# Altium PCB pir.PcbDoc
Units mil, origin at the board's own origin, x right, y up, seen from the top; angles counter-clockwise.
Board outline 1401.57 x 1050 mil, 4 copper layers (Top Layer, L2, L3, Bottom Layer), stack 74.104 mil thick; 60 components, 32 nets, 149 pads, 26 vias.
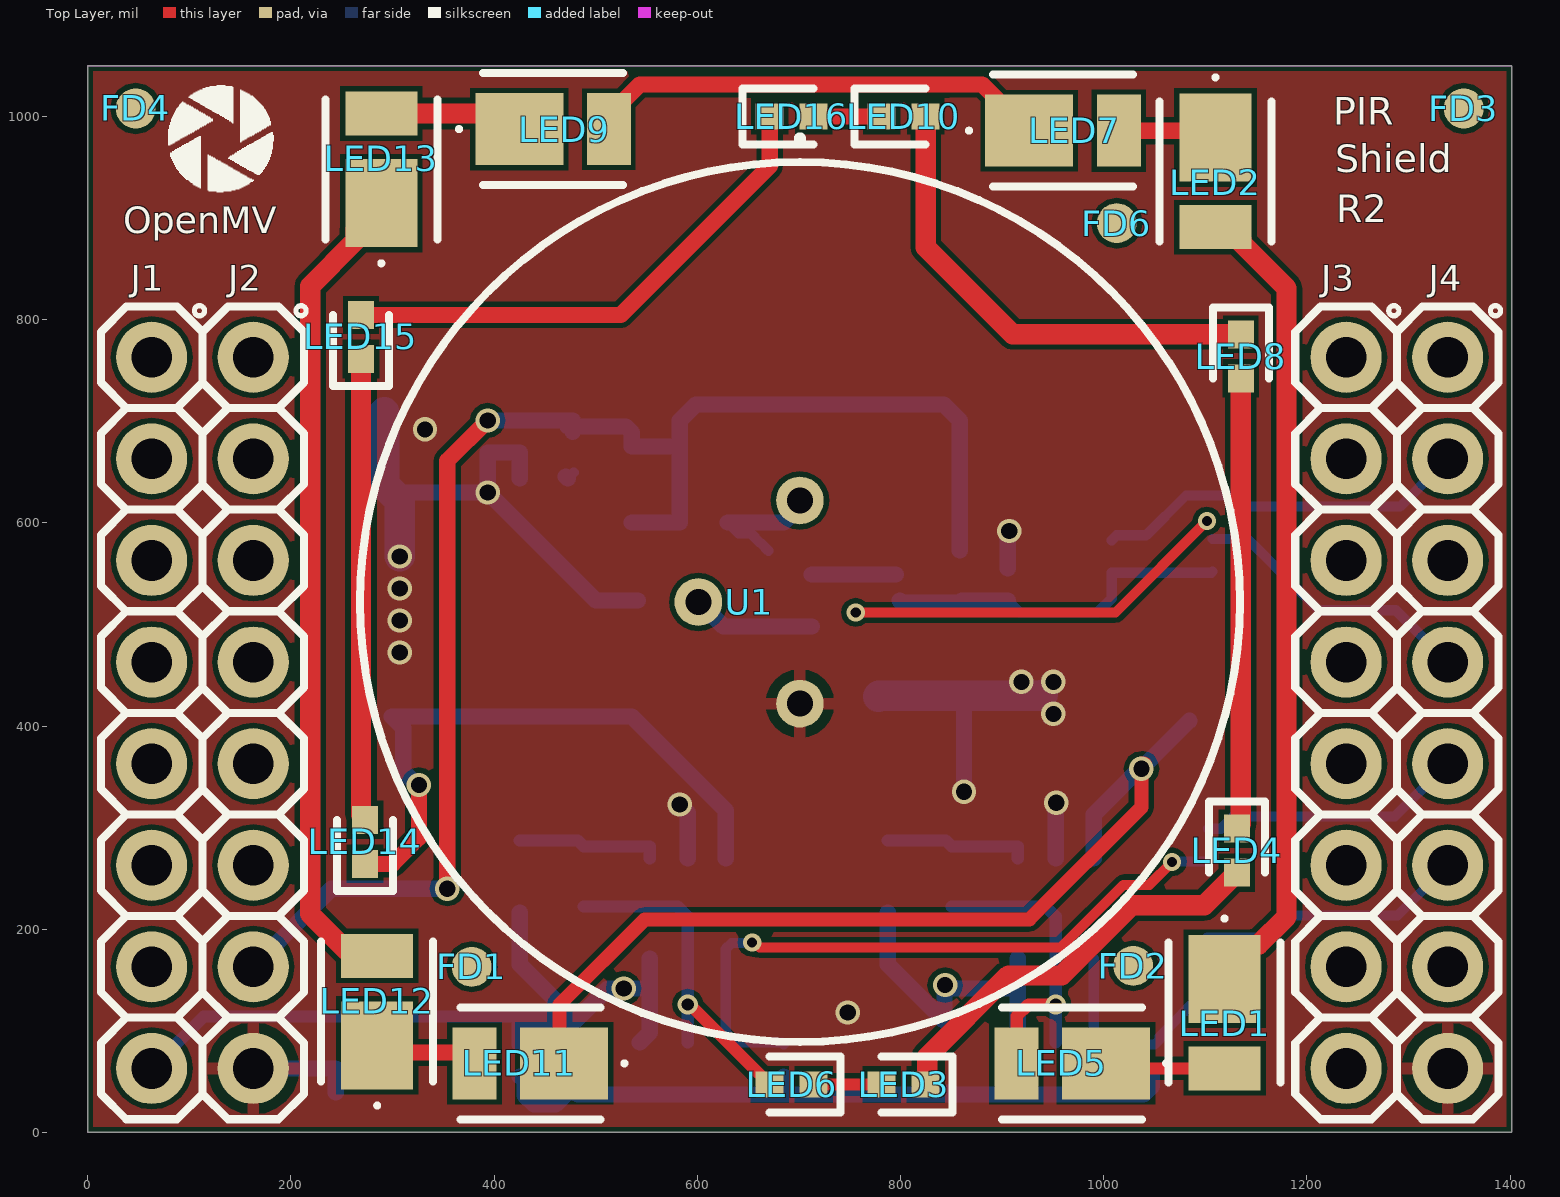
[diagram p0: Top Layer view]
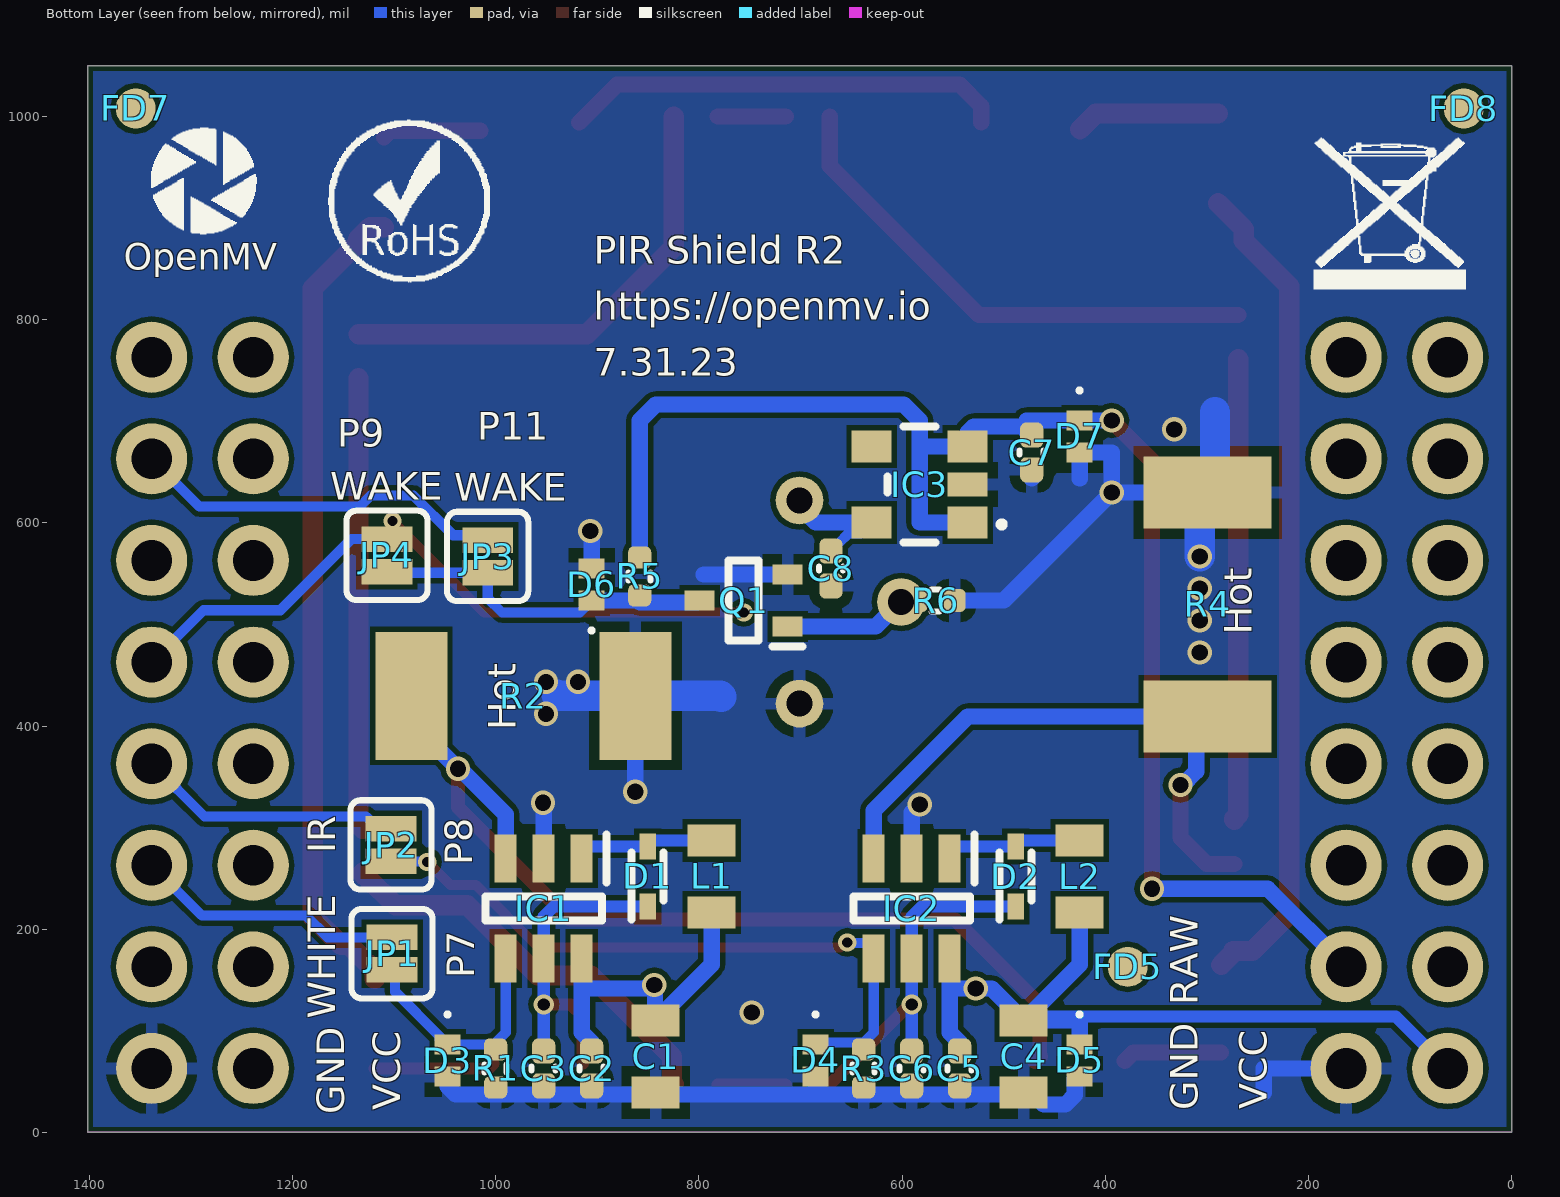
[diagram p1: Bottom Layer view, seen from below]
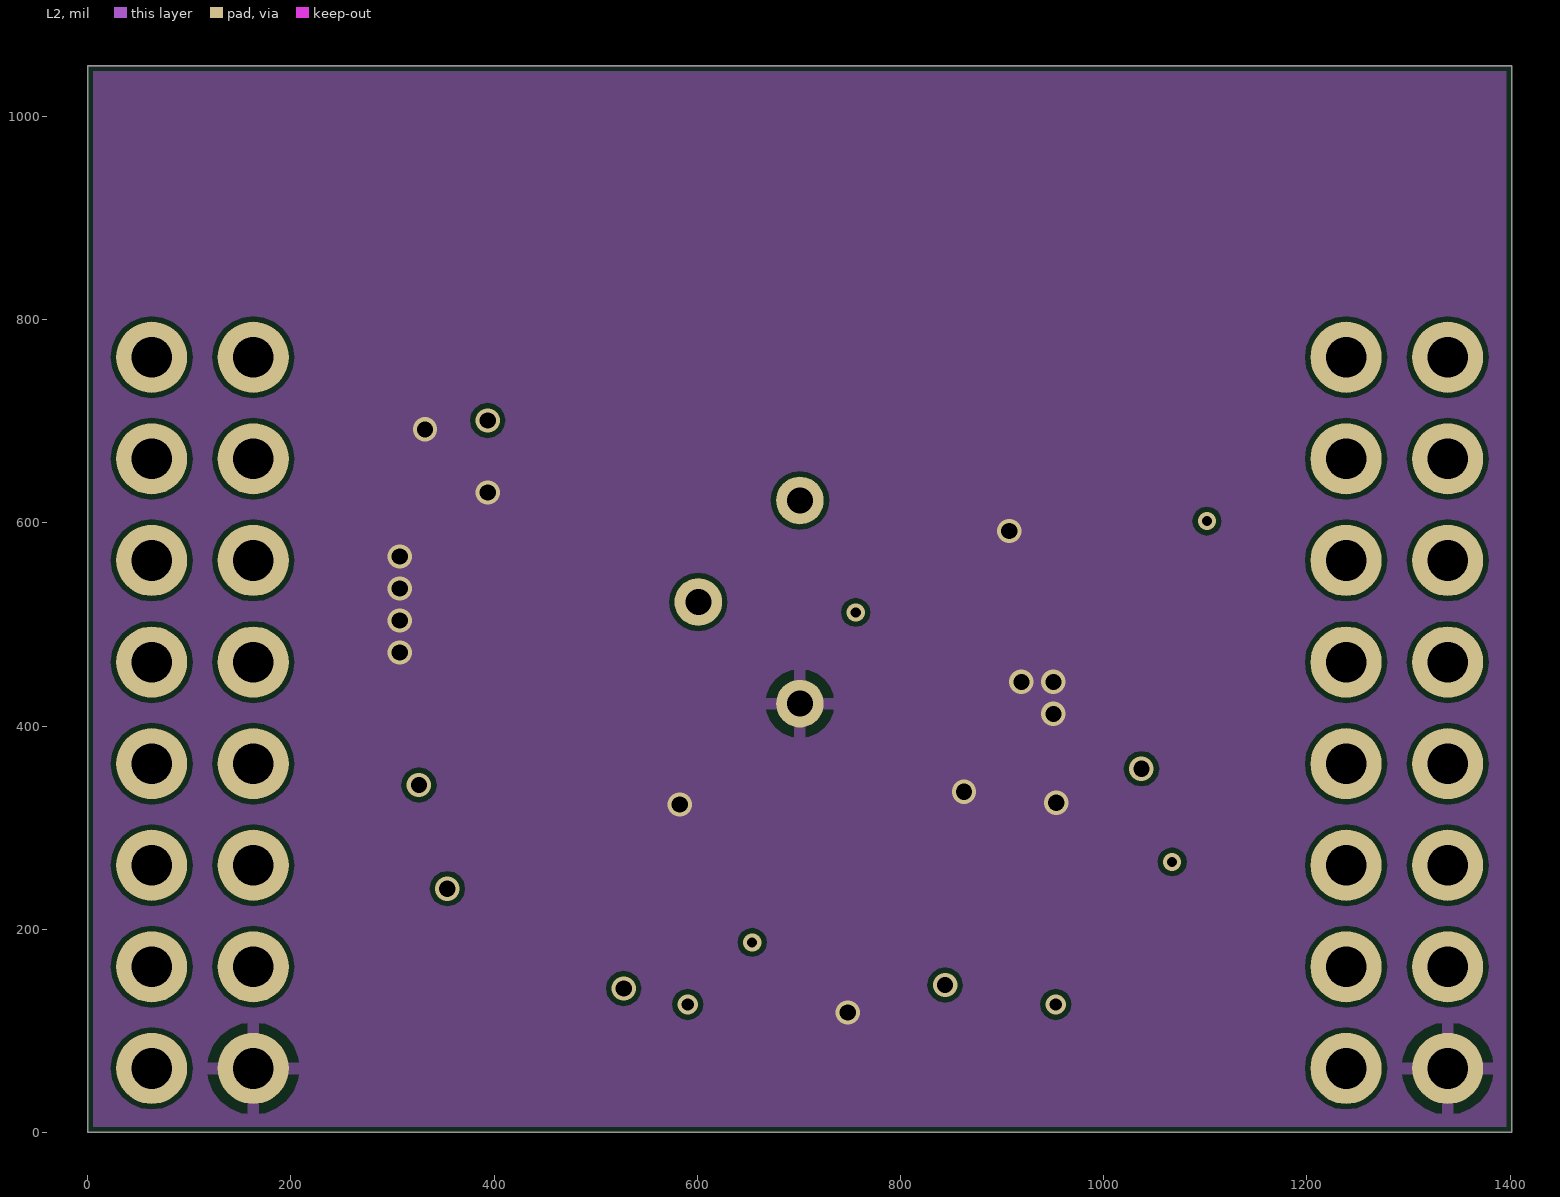
[diagram p2: L2]
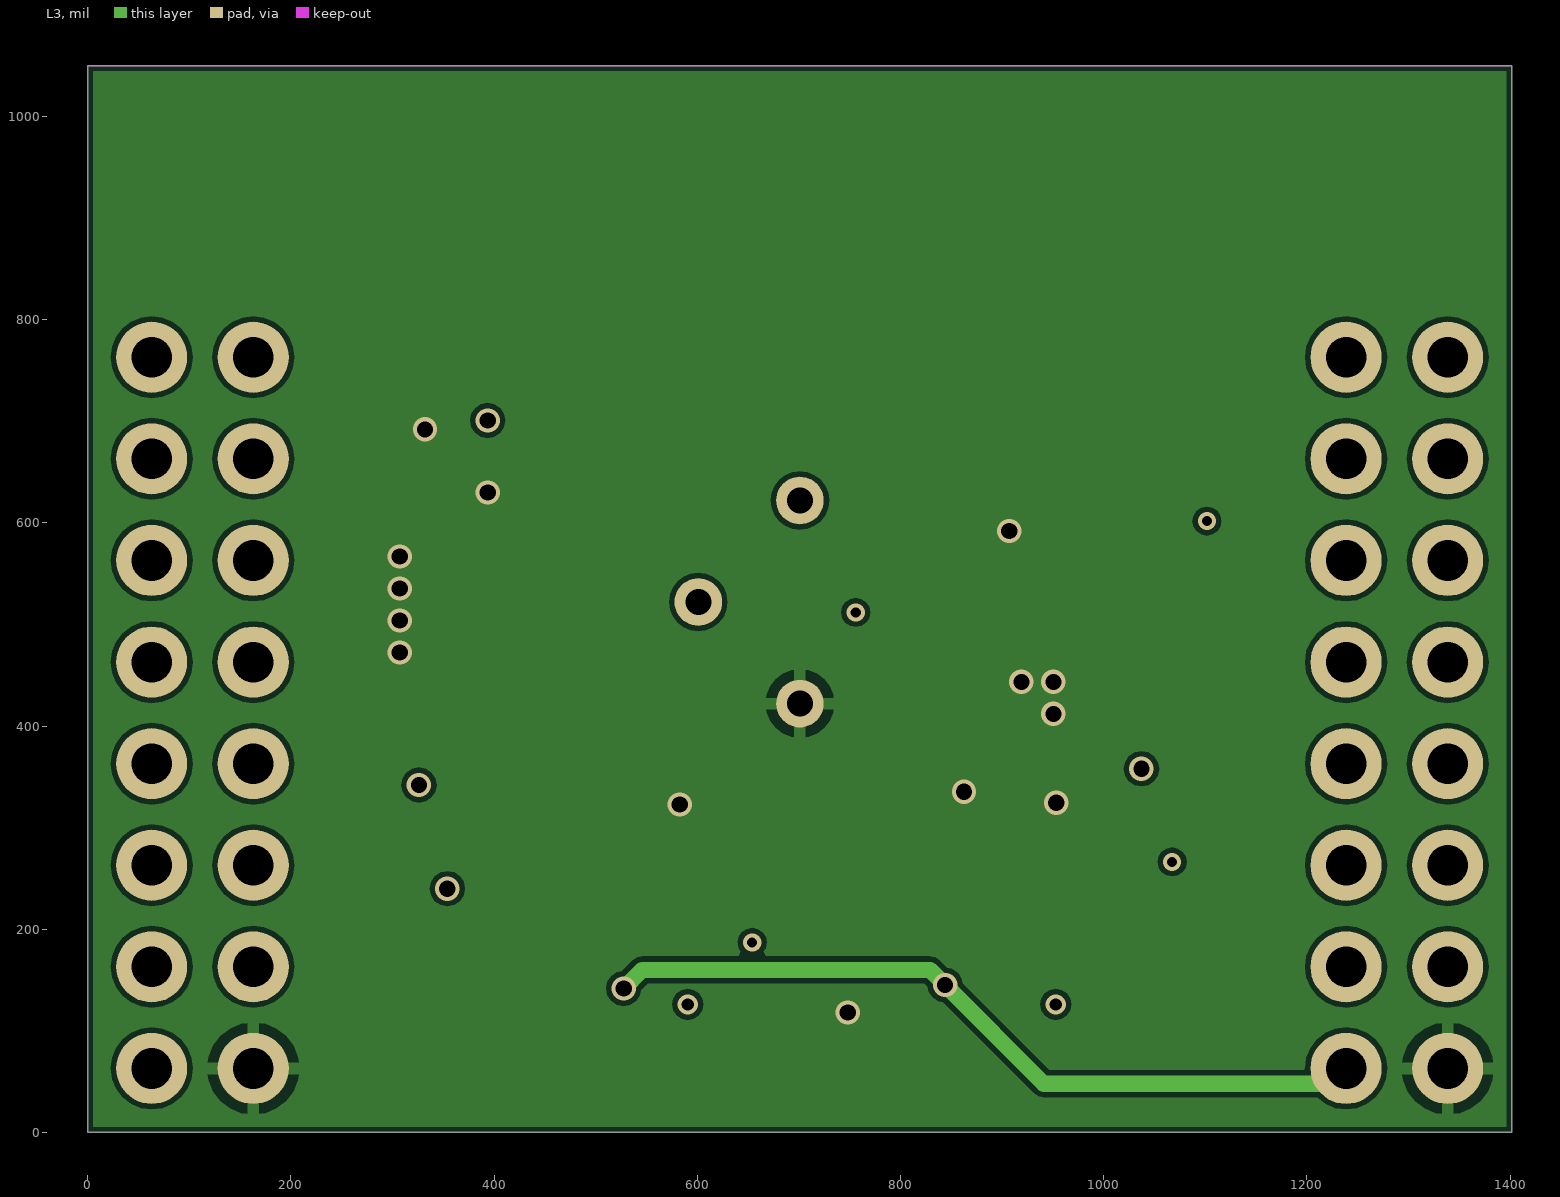
[diagram p3: L3]
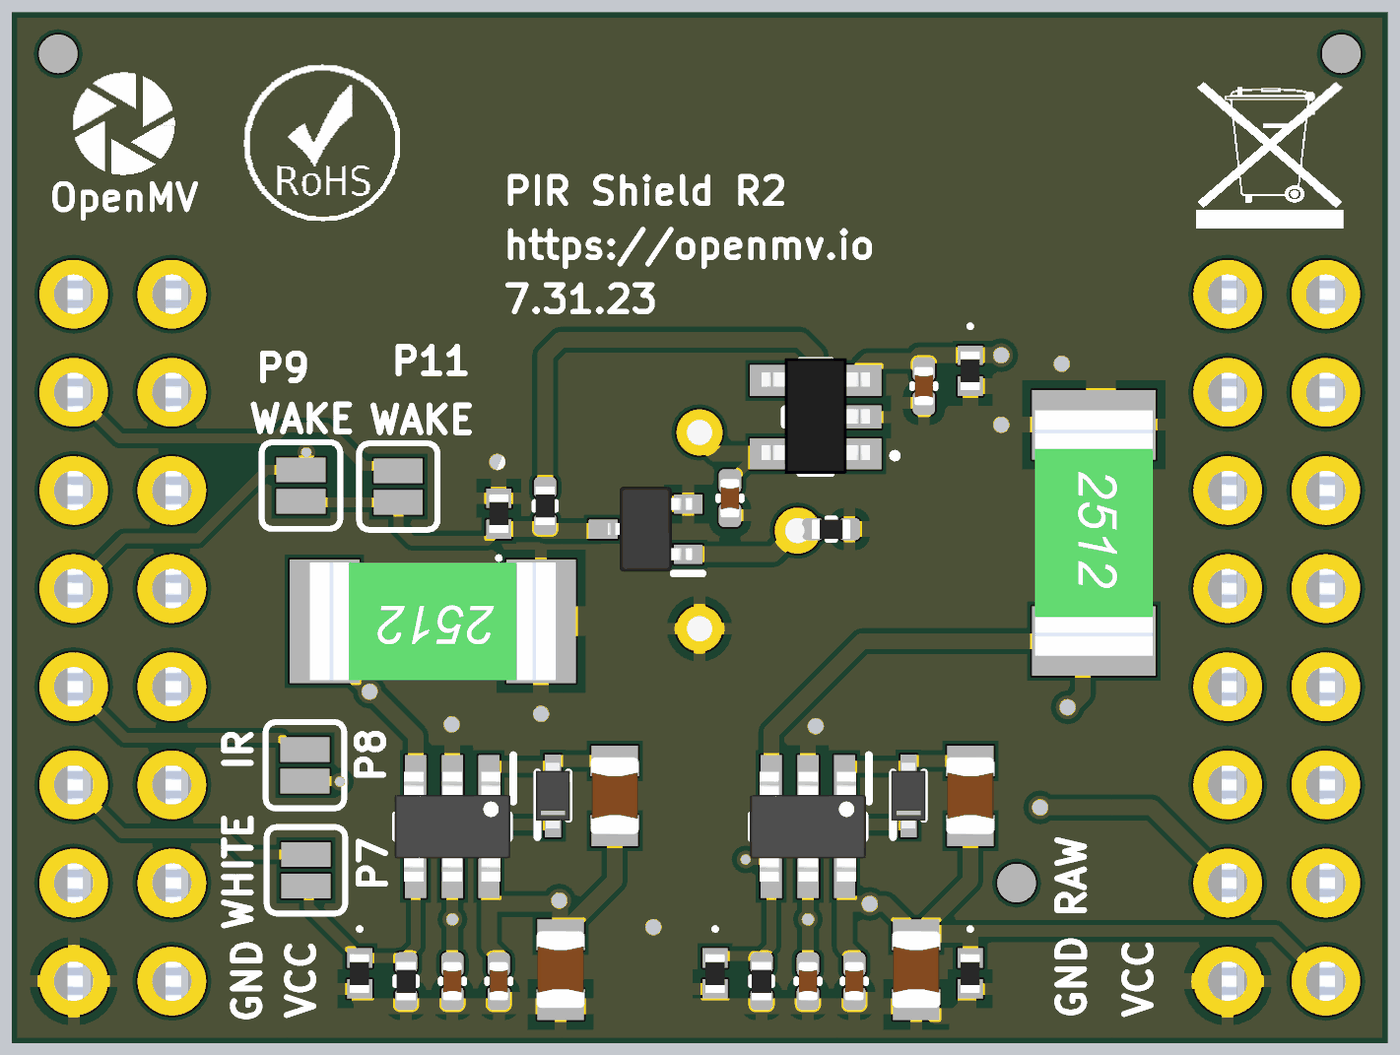
[diagram p4: 3D render of the assembled board from below, using the file's embedded part models]

## Layer stack, top to bottom
Top Solder: solder mask 0.4, Solder Resist, Dk 3.5
Top Layer: signal copper 1.378
Dielectric 2: prepreg 2.8, PP-006, Dk 4.1
L2: signal copper 1.378
Dielectric 1: dielectric 62.9921, FR-4, Dk 4.8
L3: signal copper 1.378
Dielectric 3: prepreg 2.8, PP-006, Dk 4.1
Bottom Layer: signal copper 1.378
Bottom Solder: solder mask 0.4, Solder Resist, Dk 3.5

## Board outline
0,1050 0,0 1401.57,0 1401.57,1050

## Design rules (kind name [scope] priority, off if disabled: settings)
BoardOutlineClearance mdCopperDimension [All] p1: gap=5 ignorepadtopadclearanceinfootprint=FALSE
Clearance [All] p1: gap=5 ignorepadtopadclearanceinfootprint=FALSE
ComponentClearance [InComponent('J1') or InComponent('J2') or InComponent('J?') or InComponent('U1')] p1: gap=0 collisioncheckmode=3 verticalgap=0 showdistances=FALSE
ComponentClearance ComponentClearance_1 [All] p2: gap=10 collisioncheckmode=3 verticalgap=10 showdistances=FALSE
HoleSize HoleSize_For_NetClass_signal [InNetClass('signal')] p1: absolutevalues=TRUE maxlimit=10 minlimit=10 maxpercent=80.000 minpercent=20.000
HoleSize HoleSize_For_NetClass_pwr [InNetClass('pwr')] p2: absolutevalues=TRUE maxlimit=10 minlimit=10 maxpercent=80.000 minpercent=20.000
HoleSize HoleSize_For_NetClass_gnd [InNetClass('gnd')] p3: absolutevalues=TRUE maxlimit=10 minlimit=10 maxpercent=80.000 minpercent=20.000
HoleSize HoleSize_For_NetClass_led [InNetClass('led')] p4: absolutevalues=TRUE maxlimit=10 minlimit=10 maxpercent=80.000 minpercent=20.000
HoleSize [All] p5: absolutevalues=TRUE maxlimit=100000 minlimit=10 maxpercent=80.000 minpercent=20.000
HoleToHoleClearance mdDrill [All] p1: gap=10 allowstackedmicrovias=TRUE
MinimumSolderMaskSliver [All] p1 off: minsoldermaskwidth=10
PasteMaskExpansion Expansion_SMDPaste_OFF [InPadClass('SMDPaste_OFF')] p1: expansion=0
PasteMaskExpansion mlMinCreamFrame [All] p2: expansion=0
PolygonConnect PolygonConnect_For_PolygonThermal_ON_Width120000_Gap100000 [InPolygonClass('PolygonThermal_ON_Width120000_Gap100000') vs Not IsVia] p1: connectstyle=Relief reliefconductorwidth=12 reliefentries=4 polygonreliefangle="90 Angle" airgapwidth=10
PolygonConnect ThermalVias [IsVia] p2: connectstyle=Direct reliefconductorwidth=10 reliefentries=4 polygonreliefangle="90 Angle" airgapwidth=10
PolygonConnect [All] p3: connectstyle=Relief reliefconductorwidth=10 reliefentries=4 polygonreliefangle="90 Angle" airgapwidth=10
RoutingVias [All] p1: holewidth=10 width=18 viastyle="Through Hole" minholewidth=10 minwidth=18 maxholewidth=100 maxwidth=100
SolderMaskExpansion mlMinStopFrame [All] p1: expansion=2 istentingtop=FALSE
Width [All] p1: maxlimit=200 minlimit=5 preferedwidth=5
25 further rules are at their usual default settings.

## Classes and differential pairs
polygon class PolygonThermal_ON_Width120000_Gap100000: Polygon_1_Net_GND Polygon_2_Net_GND
polygon class Isolate_6: Polygon_1_Net_GND Polygon_2_Net_GND
pad class SMDPaste_OFF: FD1-1 FD2-1 FD3-1 FD4-1 FD5-1 FD7-1 FD8-1 JP1-1 JP1-2 JP2-1 JP2-2 JP3-1 JP3-2 JP4-1 JP4-2

## Components (designator, comment, footprint, x,y, rotation, side; value= is the part's Value field where it differs from the comment)
C1 "22uF" 0805 842.52,74.8 r90 bottom
C2 "4.7uF" 0402-CAP 905.51,62.99 r90 bottom
C3 "1uF" 0402-CAP 952.76,62.99 r90 bottom
C4 "22uF" 0805 480.32,74.8 r90 bottom
C5 "4.7uF" 0402-CAP 543.31,62.99 r90 bottom
C6 "1uF" 0402-CAP 590.55,62.99 r90 bottom
C7 "4.7uF" 0402-CAP 472.44,669.29 r90 bottom
C8 "4.7uF" 0402-CAP 670,555.13 r90 bottom
D1 "RB520S30T5G" SODFL1608X70N 850.39,251.97 r90 bottom
D2 "RB520S30T5G" SODFL1608X70N 488.19,251.97 r90 bottom
D3 "CPDQT5V0HE-HF" CPDQT5V0HEHF 1047.24,70.87 r270 bottom
D4 "CPDQT5V0HE-HF" CPDQT5V0HEHF 685.04,70.87 r270 bottom
D5 "CPDQT5V0HE-HF" CPDQT5V0HEHF 425.2,70.87 r270 bottom
D6 "CPDQT5V0HE-HF" CPDQT5V0HEHF 905.51,539.37 r90 bottom
D7 "CPDQT5V0HE-HF" CPDQT5V0HEHF 425.2,685.04 r270 bottom
FD1 "FIDUCIAL1X2" FIDUCIAL-1X2 378,163 r0 top
FD2 "FIDUCIAL1X2" FIDUCIAL-1X2 1029,164 r0 top
FD3 "FIDUCIAL1X2" FIDUCIAL-1X2 1354.33,1007.87 r0 top
FD4 "FIDUCIAL1X2" FIDUCIAL-1X2 47.24,1007.87 r0 top
FD5 "FIDUCIAL1X2" FIDUCIAL-1X2 378,163 r180 bottom
FD6 "FIDUCIAL1X2" FIDUCIAL-1X2 1013,895 r0 top
FD7 "FIDUCIAL1X2" FIDUCIAL-1X2 1354.33,1007.87 r180 bottom
FD8 "FIDUCIAL1X2" FIDUCIAL-1X2 47.24,1007.87 r180 bottom
IC1 "AP3032KTR-G1" SOT95P280X145-6N 952.76,220.47 r270 bottom
IC2 "AP3032KTR-G1" SOT95P280X145-6N 590.55,220.47 r270 bottom
IC3 "TCR2LF33,LM_CT" TCR2LF33LMCT 582.68,637.8 r90 bottom
J1 "SSQ-108-03-T-S" HDR_1X8 62.99,762.99 r0 top
J2 "SSQ-108-03-T-S" HDR_1X8 162.99,762.99 r0 top
J3 "SSQ-108-03-T-S" HDR_1X8 1238.58,762.99 r0 top
J4 "SSQ-108-03-T-S" HDR_1X8 1338.58,762.99 r0 top
JP1 "JUMPER-SMT_2_NC_PASTE_SILK" SMT-JUMPER_2_NC_PASTE_SILK 1102,176 r270 bottom
JP2 "JUMPER-SMT_2_NC_PASTE_SILK" SMT-JUMPER_2_NC_PASTE_SILK 1103,283 r270 bottom
JP3 "JUMPER-SMT_2_NC_PASTE_SILK" SMT-JUMPER_2_NC_PASTE_SILK 1007.87,566.93 r270 bottom
JP4 "JUMPER-SMT_2_NO_SILK" SMT-JUMPER_2_NO_SILK 1107,568 r270 bottom
L1 "6.8uH" 0805 787.4,251.97 r90 bottom
L2 "6.8uH" 0805 425.2,251.97 r90 bottom
LED1 "JB2835AWT-W-U57EA0000-N0000001" JB2835AWTWU57EA0000N0000001 1119,118 r90 top
LED2 "JB2835AWT-W-U57EA0000-N0000001" JB2835AWTWU57EA0000N0000001 1110,946 r90 top
LED3 "SFH_4053" LEDC1005X55N 803.15,47.24 r180 top
LED4 "SFH_4053" LEDC1005X55N 1131,277.35 r270 top
LED5 "JB2835AWT-W-U57EA0000-N0000001" JB2835AWTWU57EA0000N0000001 969,68 r0 top
LED6 "SFH_4053" LEDC1005X55N 692.91,47.24 r180 top
LED7 "JB2835AWT-W-U57EA0000-N0000001" JB2835AWTWU57EA0000N0000001 960,986 r180 top
LED8 "SFH_4053" LEDC1005X55N 1135,764 r270 top
LED9 "JB2835AWT-W-U57EA0000-N0000001" JB2835AWTWU57EA0000N0000001 458.07,987.55 r180 top
LED10 "SFH_4053" LEDC1005X55N 803.15,1000 r0 top
LED11 "JB2835AWT-W-U57EA0000-N0000001" JB2835AWTWU57EA0000N0000001 435.71,68 r0 top
LED12 "JB2835AWT-W-U57EA0000-N0000001" JB2835AWTWU57EA0000N0000001 285,119 r270 top
LED13 "JB2835AWT-W-U57EA0000-N0000001" JB2835AWTWU57EA0000N0000001 289,948 r270 top
LED14 "SFH_4053" LEDC1005X55N 273,286 r90 top
LED15 "SFH_4053" LEDC1005X55N 269,783 r90 top
LED16 "SFH_4053" LEDC1005X55N 692.91,1000 r0 top
Q1 "2N7002KW_R1_00001" SOT65P210X110-3N 755.91,523.62 r0 bottom
R1 "100K" 0402-RES 1000,62.99 r270 bottom
R2 "3.9" R2512 972.75,429.79 r0 bottom
R3 "100K" 0402-RES 637.8,62.99 r270 bottom
R4 "3.9" R2512 299.21,519.68 r270 bottom
R5 "100K" 0402-RES 858.27,547.24 r90 bottom
R6 "100K" 0402-RES 566.93,523.62 r180 bottom
U1 "EKMB1307113K" EKMB1304111K 701,622.11 r180 top locked

## Footprints (in the part's own frame and the unit in brackets; to place one, negate y for a bottom-side part, rotate by r counter-clockwise, add the part's x,y. Pads: shape width x height; smd on the part's side, far side on the other; paste and mask are expansions set on the pad)
0402-CAP [mm] "Chip Capacitor, 2-Leads, Body  0402 (in) 1005 (mm), IPC Medium Density"
  rrect52% 0.63x0.58 smd mask+0.05: 1(-0.435,0) 2(0.435,0)
  silkscreen extent -0.05,-0.3 0.05,0.3, body extent -0.5,-0.25 0.5,0.25, height 0.5
0402-RES [mm] "Chip Resistor, 2-Leads, Body  0402 (in) 1005 (mm), IPC Medium Density"
  rrect51% 0.55x0.58 smd mask+0.05: 1(-0.475,0) 2(0.475,0)
  silkscreen extent -0.1,-0.28 0.1,0.28, body extent -0.5,-0.25 0.5,0.25, height 0.34
0805 [mil] "0805"
  rect 31.5x47.24 smd: 1(-35.43,0) 2(35.43,0)
  body extent -39,-25 39,25, height 49
CPDQT5V0HEHF [mm] "CPDQT5V0HEHF"
  rect 0.5x0.65 smd: 1(-0.4,0) 2(0.4,0)
  silkscreen extent -1.2,-0.05 -1.1,0.05, body extent -0.5,-0.25 0.5,0.25, height 0.34
EKMB1304111K [mm] "EKMB1304111K"
  round 1.192 hole 0.65: 1(0,0) 2(2.54,2.54) 3(0,5.08)
  silkscreen extent -11,-9.1 11,13.54, body extent -5.5,-2.96 5.5,8.04, height 10.9
FIDUCIAL-1X2 [mm] "FIDUCIAL-1X2"
  rrect100% 1x1 smd paste+0: 1(0,0)
HDR_1X8 [mil]
  round 70 hole 40: 1(0,0) 2(0,-100) 3(0,-200) 4(0,-300) 5(0,-400) 6(0,-500) 7(0,-600) 8(0,-700)
  silkscreen extent -50,-750 52,51, body extent -50,-750 50,50, height 335
JB2835AWTWU57EA0000N0000001 [mil] "JB2835AWTWU57EA0000N0000001"
  rect 86.61x70.87 smd: 1(33.27,0)
  rect 43.31x70.87 smd: 2(-54.92,0)
  silkscreen extent -69,-55 94,55, body extent -69,-55 69,55, height 28
LEDC1005X55N [mm] "LEDC1005X55N"
  rect 0.7x0.65 smd: 1(-0.55,0) 2(0.55,0)
  silkscreen extent -1.23,-0.7 0.55,0.7, body extent -0.51,-0.25 0.51,0.25, height 0.51
R2512 [mil] "R2512"
  rect 70.87x125.98 smd: 1(-110.24,0) 2(110.24,0)
  body extent -125,-60 125,60, height 60
SMT-JUMPER_2_NC_PASTE_SILK [mil] "SMT-JUMPER_2_NC_PASTE_SILK"
  rect 25x50 smd paste+0: 1(-16,0) 2(16,0)
  silkscreen extent -44,-40 44,40
SMT-JUMPER_2_NO_SILK [mil] "SMT-JUMPER_2_NO_SILK"
  rect 25x50 smd paste+0: 1(-16,0) 2(16,0)
  silkscreen extent -44,-40 44,40
SODFL1608X70N [mil] "SODFL1608X70N"
  rect 25.2x16.54 smd: 1(-29.53,0) 2(29.53,0)
  silkscreen extent -42,-16 24,16, body extent -34,-17 34,17, height 18
SOT65P210X110-3N [mm] "SOT65P210X110-3N"
  rect 0.75x0.5 smd: 1(-1.1,0.65) 2(-1.1,-0.65) 3(1.1,0)
  silkscreen extent -1.47,-1 0.37,1.15, body extent -1.2,-1.1 1.2,1.1, height 1.1
SOT95P280X145-6N [mil] "SOT95P280X145-6N"
  rect 47.24x21.65 smd: 1(-49.21,37.4) 2(-49.21,0) 3(-49.21,-37.4) 4(49.21,-37.4) 5(49.21,0) 6(49.21,37.4)
  silkscreen extent -73,-57 12,62, body extent -56,-59 56,59, height 44
TCR2LF33LMCT [mm] "TCR2LF33LMCT"
  rect 0.8x1 smd: 1(-0.95,-1.2) 3(0.95,-1.2) 4(0.95,1.2) 5(-0.95,1.2)
  rect 0.6x1 smd: 2(0,-1.2)
  silkscreen extent -1.45,-2.1 1.45,0.8, body extent -1.46,-1.4 1.52,1.4, height 1.18

## Part data
C1 C4: library part 22UF-0805-6.3V-20%, "22ÂµF ceramic capacitors    A capacitor is a passive two-terminal electrical component used to store electrical energy temporarily in an electric field.", MPN=CL21A226MQQNNNE, DeviceName=-0805-6.3V-20%, DeviceSetName=22UF, GateName_1=G$1, LibraryName=SparkFun-Capacitors, PROD_ID=CAP-08402, SymbolName_1=CAP
C2 C5 C7 C8: library part CAP0402-CAP, "CapacitorStandard 0603 ceramic capacitor, and 0.1\" leaded capacitor.", MPN=JMK105BBJ475MV-F, DeviceName=0402-CAP, DeviceSetName=CAP, GateName_1=G$1, LibraryName=sfe, SymbolName_1=CAP
C3 C6: library part CAP0402-CAP, "CapacitorStandard 0603 ceramic capacitor, and 0.1\" leaded capacitor.", MPN=GRM155R6YA105KE11D, DeviceName=0402-CAP, DeviceSetName=CAP, GateName_1=G$1, LibraryName=sfe, SymbolName_1=CAP
D1 D2: "Diode Schottky 30V 0.2A Automotive 2-Pin SOD-523 T/R   Source:  Datasheet", MANUFACTURER_NAME=onsemi, DeviceSetName=RB520S30T5G, GateName_1=G$1, HEIGHT=0.7mm, LibraryName=RB520S30T5G, MANUFACTURER_PART_NUMBER=RB520S30T5G, MOUSER_PART_NUMBER=863-RB520S30T5G, MOUSER_PRICE-STOCK=https://www.mouser.co.uk/ProductDetail/onsemi/RB520S30T5G?qs=M3GgpExcU29g6z8VWjIiaA%3D%3D, MPN=RB520S30T5G, SymbolName_1=RB520S30T5G
D3 D4 D5 D6 D7: "ESD Suppressors / TVS Diodes DIODE ESD 5VWM 65W 0402/SOD-923F   Source:  Datasheet", MANUFACTURER_NAME="Comchip Technology", DeviceSetName=CPDQT5V0HE-HF, GateName_1=G$1, HEIGHT=0.42mm, LibraryName=CPDQT5V0HE-HF, MANUFACTURER_PART_NUMBER=CPDQT5V0HE-HF, MOUSER_PART_NUMBER=MOUSER_PART_NUMBER, MOUSER_PRICE-STOCK=MOUSER_PRICE-STOCK, MPN=CPDQT5V0HE-HF, SymbolName_1=CPDQT5V0HE-HF
FD1 FD2 FD3 FD4 FD5 FD6 FD7 FD8: "Fiducial Alignment Points    Point-of-reference for pick-and-place machines and other optical instruments.", DeviceName=1X2, DeviceSetName=FIDUCIAL, GateName_1=G$1, LibraryName=SparkFun-Aesthetics, SymbolName_1=FIDUCIAL
IC1 IC2: "DiodesZetex AP3032KTR-G1, Step Up DC-DC Converter, Adjustable, Maximum of 38 V, 6-Pin SOT-23   Source:  Datasheet", MANUFACTURER_NAME="Diodes Inc.", DeviceSetName=AP3032KTR-G1, GateName_1=G$1, HEIGHT=1.45mm, LibraryName=AP3032KTR-G1, MANUFACTURER_PART_NUMBER=AP3032KTR-G1, MOUSER_PART_NUMBER=621-AP3032KTR-G1, MOUSER_PRICE-STOCK=https://www.mouser.co.uk/ProductDetail/Diodes-Incorporated/AP3032KTR-G1?qs=x6A8l6qLYDBKP%252BiASla%2FZw%3D%3D, MPN=AP3032KTR-G1, SymbolName_1=AP3032KTR-G1
IC3: "Linear Voltage Regulator IC Positive Fixed 1 Output 200mA SMV   Source:  Datasheet", MANUFACTURER_NAME=Toshiba, MANUFACTURER_PART_NUMBER=TCR2LF33,LM(CT, DeviceSetName=TCR2LF33,LM_CT, GateName_1=G$1, HEIGHT=1.4mm, LibraryName=TCR2LF33_LM_CT, MOUSER_PART_NUMBER=757-TCR2LF33LMCT, MOUSER_PRICE-STOCK=https://www.mouser.co.uk/ProductDetail/Toshiba/TCR2LF33LMCT?qs=lX6dEUlT%252BgfjY8NAoxAO5A%3D%3D, MPN=TCR2LF33,LM(CT, SymbolName_1=TCR2LF33,LM_CT
J1 J2 J3 J4: library part HDR_1X8, MANUFACTURER P/N=SSQ-108-03-T-S
JP1 JP2 JP3: "Normally closed solder jumper    This jumper has an aperture in the stencil to allow solder paste to bridge the split in the wire so it's normally closed (NC). Wick off the solder to open the connection. Reapply solder to reclose the connection.", DeviceName=_SILK, DeviceSetName=JUMPER-SMT_2_NC_PASTE, GateName_1=G$1, LibraryName=SparkFun-Jumpers, SymbolName_1=SMT-JUMPER_2_NC_PASTE
JP4: "Normally open jumper    This jumper has two pads in close proximity to each other. Apply solder to close the connection.   Round pads are easier to solder for beginners, but are a lot larger.   SparkFun Product that uses the round pads:  SparkFun EL Sequencer", DeviceName=_SILK, DeviceSetName=JUMPER-SMT_2_NO, GateName_1=G$1, LibraryName=SparkFun-Jumpers, SymbolName_1=SMT-JUMPER_2_NO
L1 L2: library part INDUCTOR-0805-3.3UH, "Inductors    Resist changes in electrical current. Basically a coil of wire.   SparkFun Products:  SparkFun Load Cell Amplifier - HX711  IOIO-OTG - V2.2", MPN=MLZ2012M6R8WT000, DeviceName=-0805-3.3UH, DeviceSetName=INDUCTOR, GateName_1=G$1, LibraryName=SparkFun-Coils, PROD_ID=NDUC-13076, SymbolName_1=INDUCTOR
LED1 LED2 LED5 LED7 LED9 LED11 LED12 LED13: "Mid-Power LEDs - White White 5700 K 90-CRI, 2835 Size, W Class   Source:  Datasheet", MANUFACTURER_NAME=Wolfspeed, DeviceSetName=JB2835AWT-W-U57EA0000-N0000001, GateName_1=G$1, HEIGHT=0.8mm, LibraryName=JB2835AWT-W-U57EA0000-N0000001, MANUFACTURER_PART_NUMBER=JB2835AWT-W-U57EA0000-N0000001, MOUSER_PART_NUMBER=941-JB2835AWTU57EAN, MOUSER_PRICE-STOCK=https://www.mouser.co.uk/ProductDetail/Cree-LED/JB2835AWT-W-U57EA0000-N0000001?qs=7MVldsJ5UaxVpdW62VaK8g%3D%3D, MPN=JB2835AWT-W-U57EA0000-N0000001, SymbolName_1=JB2835AWT-W-U57EA0000-N0000001
LED3 LED4 LED6 LED8 LED10 LED14 LED15 LED16: "IR Emitter,High Power,CHIPLED,850nm,140d Osram Opto SFH 4053 CHIPLED IR LED, 860nm, 0402 SMD package   Source:  Datasheet", MANUFACTURER_NAME=OSRAM, MANUFACTURER_PART_NUMBER="SFH 4053", DeviceSetName=SFH_4053, GateName_1=G$1, HEIGHT=0.55mm, LibraryName=SFH_4053, MOUSER_PART_NUMBER=720-SFH4053, MOUSER_PRICE-STOCK=https://www.mouser.co.uk/ProductDetail/OSRAM-Opto-Semiconductors/SFH-4053?qs=WFZtTl33IYKBVpRycaqUAw%3D%3D, MPN="SFH 4053", SymbolName_1=SFH_4053
Q1: "MOSFET 60V N-Channel Enhancement Mode MOSFET - ESD Protected   Source:  Datasheet", MANUFACTURER_NAME=PANJIT, DeviceSetName=2N7002KW_R1_00001, GateName_1=G$1, HEIGHT=1.1mm, LibraryName=2N7002KW_R1_00001, MANUFACTURER_PART_NUMBER=2N7002KW_R1_00001, MOUSER_PART_NUMBER=241-2N7002KWR100001, MOUSER_PRICE-STOCK=https://www.mouser.co.uk/ProductDetail/Panjit/2N7002KW_R1_00001?qs=sPbYRqrBIVliWKATqv7jNA%3D%3D, MPN=2N7002KW_R1_00001, SymbolName_1=2N7002KW_R1_00001
R1 R3 R5 R6: library part RESISTOR0402-RES, "ResistorBasic schematic elements and footprints for 0603, 1206, and PTH resistors.", MPN=AC0402FR-07100KL, DeviceName=0402-RES, DeviceSetName=RESISTOR, GateName_1=G$1, LibraryName=sfe, SymbolName_1=RESISTOR
R2 R4: library part R-US_R2512, "RESISTOR, American symbol", MPN=35203R9JT, DeviceName=R2512, DeviceSetName=R-US_, GateName_1=G$1, LibraryName=rcl, POPULARITY=0, SPICEPREFIX=R, SymbolName_1=R-US
U1: library part EKMB1304111K, "Sensor PIR (Passive Infrared) 472\" (12m) 39.4'  Module   Source:  Datasheet", MANUFACTURER_NAME=Panasonic, DeviceSetName=EKMB1304111K, GateName_1=G$1, HEIGHT=20.7mm, LibraryName=EKMB1304111K, MANUFACTURER_PART_NUMBER=EKMB1304111K, MOUSER_PART_NUMBER=769-EKMB1304111K, MOUSER_PRICE-STOCK=https://www.mouser.co.uk/ProductDetail/Panasonic-Industrial-Devices/EKMB1304111K?qs=gtWD0wcPNfNnxnKOQp2%252BgA%3D%3D, MPN=EKMB1307113K, SymbolName_1=EKMB1304111K

## Via types
v1: diameter 24, hole 16, Top Layer to Bottom Layer, tented both sides, 20 vias
v2: diameter 18, hole 10, Top Layer to Bottom Layer, tented both sides, 4 vias
v3: diameter 20, hole 12, Top Layer to Bottom Layer, tented both sides, 2 vias

## Nets (pads, with @x,y where several pads share a name; then routed paths per layer and width w, separated by ;. In a path a pad name is that pad's centre, name@x,y a point inside that pad or via, vN(x,y) a via of type N, cw(c..) or ccw(c..) an arc to the next point about the centre after c; other vN are vias at no path point)
GND: C1.1 C2.1 C3.1 C4.1 C5.1 C6.1 C7.1 C8.1 D3.2 D4.2 D5.2 D6.2 D7.2 IC1.2 IC2.2 IC3.2 J2.8 J4.8 Q1.2 R1.2 R2.1 R3.2 R4.1 R6.2 U1.3 | length 1827.5
  Bottom Layer w10: C7.1@472.44,643.7 C7.1@478.35,649.61
  Bottom Layer w16: J2.8 244.09,62.99 244.09,39.37 ; R4.1 v1(393.7,629.92) ; D5.2 428.15,55.12 430,53.27 430,36.83 439.37,27.46 460.54,27.46 472.45,39.37 C4.1 482.28,37.4 677.17,37.4 ; 425.2,643.7 D7.2 393.7,669.29 v1(393.7,629.92) ; C7.1@470.47,645.67 C7.1@472.44,643.7 ; R6.2@541.34,523.62 500,523.62 v1(393.7,629.92) ; v1(582.68,322.83) 590.55,314.96 IC2.2 ; D4.2 685.04,45.28 677.17,37.4 ; Q1.2 795.28,549.21 ; C1.1 848.43,39.37 C1.1@850.39,37.4 ; v1(862.51,335.3) R2.1 ; D6.2 905.51,590.51 v1(907,592) ; IC1.2 952.76,323.94 v1(953.42,324.6) ; D3.2 1047.24,45.28 1039.37,37.4 C1.1@850.39,37.4 ; 677.17,37.4 C1.1@850.39,37.4
  Bottom Layer w30: 292,709 292,637.13 R4.1 306.96,622.17 306.96,567.06 v1(307.09,566.93) ; 778,429 778.79,429.79 R2.1 938.79,429.79 940,431
  other v1: 748.03,118.11 950.5,412 919,443.5 950.5,443.5 307.09,472.44 307.09,503.94 307.09,535.43 332,692
I1: LED3.2 LED6.1 | length 66.9
  Top Layer w12: LED6.1 LED3.2
I2: LED3.1 LED4.2 | length 408.2
  Top Layer w20: LED3.1 826.4,48.84 826.4,74.64 906.29,154.54 958.6,154.54 1027.81,223.75 1099.05,223.75 1127.22,251.92 1128.2,251.92 1131,254.72 LED4.2
I3: LED4.1 LED8.2 | length 445
  Top Layer w20: LED4.1 1131,299.99 1135,303.99 LED8.2
I4: LED8.1 LED10.2 | length 474.4
  Top Layer w20: LED10.2 824.8,871.2 910.35,785.65 LED8.1
I5: LED10.1 LED16.2 | length 66.9
  Top Layer w16: LED16.2 LED10.1
I6: LED15.2 LED16.1 | length 511.7
  Top Layer w16: LED15.2 524.65,804.65 671.26,951.26 LED16.1
I7: LED14.2 LED15.1 | length 455.4
  Top Layer w20: LED15.1 269,312.63 273,308.63 LED14.2
IFB: IC2.3 LED14.1 R4.2 | length 609.7
  Top Layer w16: LED14.1 300.35,264.35 326,290 v1(326,342)
  Bottom Layer w16: v1(326,342) 323.89,342 310.52,355.37 310.52,398.14 R4.2 535.43,409.45 627.95,316.93 IC2.3
IOV: C6.2 D2.1 IC2.5 LED6.2 | length 343.8
  Top Layer w12: v3(590.55,125.98) 592.52,125.98 LED6.2
  Bottom Layer w12: D2.1 580.71,222.44 590.55,212.6 IC2.5 v3(590.55,125.98) C6.2@590.55,88.58
ISW: D2.2 IC2.1 L2.2 | length 142.2
  Bottom Layer w12: L2.2 482.28,287.4 D2.2 553.15,281.5 IC2.1
OUT: Q1.1 R6.1 U1.2 | length 130.7
  Bottom Layer w16: U1.2@592.52,523.62 600.25,523.62 625.84,498.03 Q1.1
P7_PWM: D3.1 IC1.4 JP1.2 R1.1 | length 232.6
  Bottom Layer w10: IC1.4 990.16,98.43 1000,88.58 1001.97,86.61 1050.18,86.61 1055.04,91.47 1055.04,94.41 1098.99,138.36 1098.99,156.99 JP1.2
P7_PWM_INT: J4.6 JP1.1 | length 266
  Bottom Layer w10: JP1.1 1165.39,192 1187,213.61 1289.2,213.61 J4.6
P8_PWM: D4.1 IC2.4 JP2.2 R3.1 | length 659.2
  Top Layer w10: v2(654,187) 656.16,187 661.16,182 957.78,182 1019.53,243.75 1044.83,243.75 v2(1067.35,266.26)
  Bottom Layer w10: v2(654,187) 653.57,186.57 633.77,186.57 627.95,180.75 627.95,98.43 637.8,88.58 683.07,88.58 D4.1 ; v2(1067.35,266.26) 1067.72,266.63 1102.63,266.63 JP2.2
P8_PWM_INT: J4.5 JP2.1 | length 262.1
  Bottom Layer w10: JP2.1 1115.5,299 1127.5,311 1286.59,311 J4.5
P11_WAKEUP: D6.1 JP3.2 JP4.2 Q1.3 R5.1 | length 345.6
  Bottom Layer w10: D6.1 917.32,511.81 993.8,511.81 1007.87,525.88 JP3.2 1105.93,550.93 JP4.2
  Bottom Layer w16: Q1.3 801.18,521.65 858.27,521.65 860.24,523.62 D6.1
P11_WAKEUP_INT: J4.2 JP3.1 | length 373
  Bottom Layer w10: JP3.1 1012.7,587.76 1041.76,587.76 1081,627 1123,627 1134,616 1291.59,616 J4.2
P11_WAKEUP_INT_2: J4.4 JP4.1 | length 664.7
  Top Layer w10: v2(755.91,511.81) 1011.61,511.81 v2(1101.6,601.8)
  Bottom Layer w10: JP4.1 1142,584 1212,514 1287.57,514 J4.4
RAW: C7.2 D7.1 IC3.1 IC3.3 J2.7 R5.2 | length 1492.9
  Top Layer w16: v1(354,240) 354,661.09 v1(393.7,700.79)
  Bottom Layer w10: C7.2@472.44,694.88 C7.2@477.53,689.79
  Bottom Layer w16: J2.7 240,240 v1(354,240) ; v1(393.7,700.79) D7.1 477.53,700.79 C7.2@477.53,689.79 ; C7.2@472.44,694.88 529.53,694.88 535.43,688.98 IC3.3 582.68,675.2 ; IC3.1 582.68,600.39 582.68,675.2 ; R5.2@858.27,572.83 858.27,700.79 842.52,716.54 598.43,716.54 582.68,700.79 582.68,675.2
VCC: C1.2 C2.2 C4.2 C5.2 D5.1 IC1.6 IC2.6 J1.8 J3.8 L1.1 L2.1 | length 1919.4
  Top Layer w16: v1@842.88,145.13 v1(843.9,145.13)
  L3 w16: v1(527.56,141.73) 545.83,160 829.03,160 v1(843.9,145.13) 941.03,48 1223.59,48 J3.8
  Bottom Layer w10: C4.2 C4.2@480.32,114.17
  Bottom Layer w12: J1.8 114.17,114.17 C4.2@480.32,114.17
  Bottom Layer w16: D5.1 425.2,110.24 C4.2 ; L2.1 425.2,165.35 C4.2 ; C5.2@543.31,88.58 553.15,98.43 553.15,141.73 ; IC2.6 553.15,141.73 ; L1.1 787.4,165.35 C1.2 843.21,110.93 843.21,144.44 v1(843.9,145.13) 845.43,143.6 851.09,143.6 852.95,141.73 915.35,141.73 ; C2.2@905.51,88.58 915.35,98.43 915.35,141.73 ; IC1.6 915.35,141.73 ; C4.2 511.81,141.73 v1(527.56,141.73) 553.15,141.73
VDD: C8.2 IC3.5 U1.1 | length 135.5
  Bottom Layer w10: IC3.5 640.67,589.65 652.6,589.65 662.6,579.65 663.08,579.65 670,572.73 C8.2
  Bottom Layer w16: IC3.5 685.04,600.39 701,616.35 U1.1
W1: LED1.2 LED5.1 | length 118.8
  Top Layer w12: LED5.1 1007.19,63.08 LED1.2
W2: LED1.1 LED2.2 | length 806.8
  Top Layer w20: LED2.2 1123.78,891.08 1135.43,879.42 1135.43,875.57 1180,831 1180,212.27 1152.31,184.57 1144.43,184.57 1119,159.14 LED1.1
W3: LED2.1 LED7.2 | length 97.9
  Top Layer w16: LED7.2 1103.27,986 LED2.1
W4: LED7.1 LED9.2 | length 436.5
  Top Layer w16: LED9.2@522,994 522,1010.19 543.31,1031.5 880.5,1031.5 LED7.1@918,994
W5: LED9.1 LED13.2 | length 142.2
  Top Layer w20: LED13.2 409.44,1002.92 LED9.1
W6: LED12.2 LED13.1 | length 815.6
  Top Layer w20: LED12.2@274.35,176.57 LED12.2@286,164.92 ; LED12.2@274.35,178.57 255.43,178.57 219,215 219,833 263.56,877.57 263.56,889.3 LED13.1
W7: LED11.2 LED12.1 | length 98.3
  Top Layer w16: LED12.1@286,78.73 372.44,78.73 LED11.2@380.79,70.38
WFB: IC1.3 LED11.1 R2.2 | length 930.3
  Top Layer w14: LED11.1@464.47,74.89 464.47,125.89 548.22,209.64 926.64,209.64 1037.12,320.12 v1(1037.12,357.99)
  Top Layer w16: LED11.1@464.47,74.89 LED11.1@468.98,70.38 ; v1@1037.12,362.2 v1@1039.37,362.2
  Bottom Layer w16: IC1.3 990.16,312.99 1023.62,346.46 1036.14,358.97 v1@1039.37,362.2 ; v1(1037.12,357.99) R2.2@1084.36,405.24
WOV: C3.2 D1.1 IC1.5 LED5.2 | length 320.2
  Top Layer w12: LED5.2 914.41,68.33 914.41,114.41 925.98,125.98 v3(952.76,125.98)
  Bottom Layer w12: D1.1 942.91,222.44 952.76,212.6 IC1.5 v3(952.76,125.98) C3.2@952.76,88.58
WSW: D1.2 IC1.1 L1.2 | length 142.2
  Bottom Layer w12: L1.2 844.49,287.4 D1.2 915.35,281.5 IC1.1
pads on no net: FD1.1 FD2.1 FD3.1 FD4.1 FD5.1 FD6.1 FD7.1 FD8.1 IC3.4 J1.1 J1.2 J1.3 J1.4 J1.5 J1.6 J1.7 J2.1 J2.2 J2.3 J2.4 J2.5 J2.6 J3.1 J3.2 J3.3 J3.4 J3.5 J3.6 J3.7 J4.1 J4.3 J4.7

## Polygon pours and split planes (outlines as drawn)
GND on Bottom Layer "Polygon_1_Net_GND" (solid, remove dead copper, pour order 0): 1.87,1.87 1399.7,1.87 1399.7,1053.24 1.87,1053.24
GND on Top Layer "Polygon_2_Net_GND" (solid, remove dead copper, pour order 1): -2.06,-2.06 1403.64,-2.06 1403.64,1057.18 -2.06,1057.18
GND on L3 "Polygon_1_Net_GND" (solid, remove dead copper, pour order 2): 1.87,1.87 1399.7,1.87 1399.7,1053.24 1.87,1053.24
GND on L2 "Polygon_1_Net_GND" (solid, remove dead copper, pour order 3): 1.87,1.87 1399.7,1.87 1399.7,1053.24 1.87,1053.24

## Keep-outs
Keep-Out Layer:
  the board outline again, w0

## Silkscreen, mask and mechanical layers (free items; w line width, h text height)
Top Overlay:
  drawing of 262 lines, arcs and shapes, not listed
  text "PIR" at 1226,992 h27.2
  text "Shield" at 1228,945 h27.2
  text "R2" at 1229,896 h27.2
  text "OpenMV" at 35,885 h26.35
Bottom Overlay:
  drawing of 1318 lines, arcs and shapes, not listed
  text "PIR Shield R2" at 903.39,855.15 h27.2
  text "OpenMV" at 1366.14,848.96 h26.35
  text "https://openmv.io" at 903.39,800.03 h27.2
  text "7.31.23" at 903.39,744.91 h27.2
  text "P11" at 1018,682 h27.2
  text "P9" at 1156,675 h27.2
  text "WAKE" at 1163,623 h27.2
  text "WAKE" at 1041,622 h27.2
  text "Hot" at 256,490 h27.2 r270
  text "Hot" at 980,396 h27.2 r270
  text "IR" at 1158,275 h27.2 r270
  text "P8" at 1023,263 h27.2 r270
  text "P7" at 1021,152 h27.2 r270
  text "RAW" at 309,125 h27.2 r270
  text "WHITE" at 1158,112 h27.2 r270
  text "VCC" at 241,23 h27.2 r270
  text "GND" at 309,22 h27.2 r270
  text "VCC" at 1094,22 h27.2 r270
  text "GND" at 1149,18 h27.2 r270